# Altium PCB Board.PcbDoc (part 1 of 3)
Units mm, origin at the board's own origin, x right, y up, seen from the top; angles counter-clockwise.
Board outline 120 x 89 mm, 2 copper layers (Top Layer, Bottom Layer); 165 components, 194 nets, 816 pads, 265 vias.
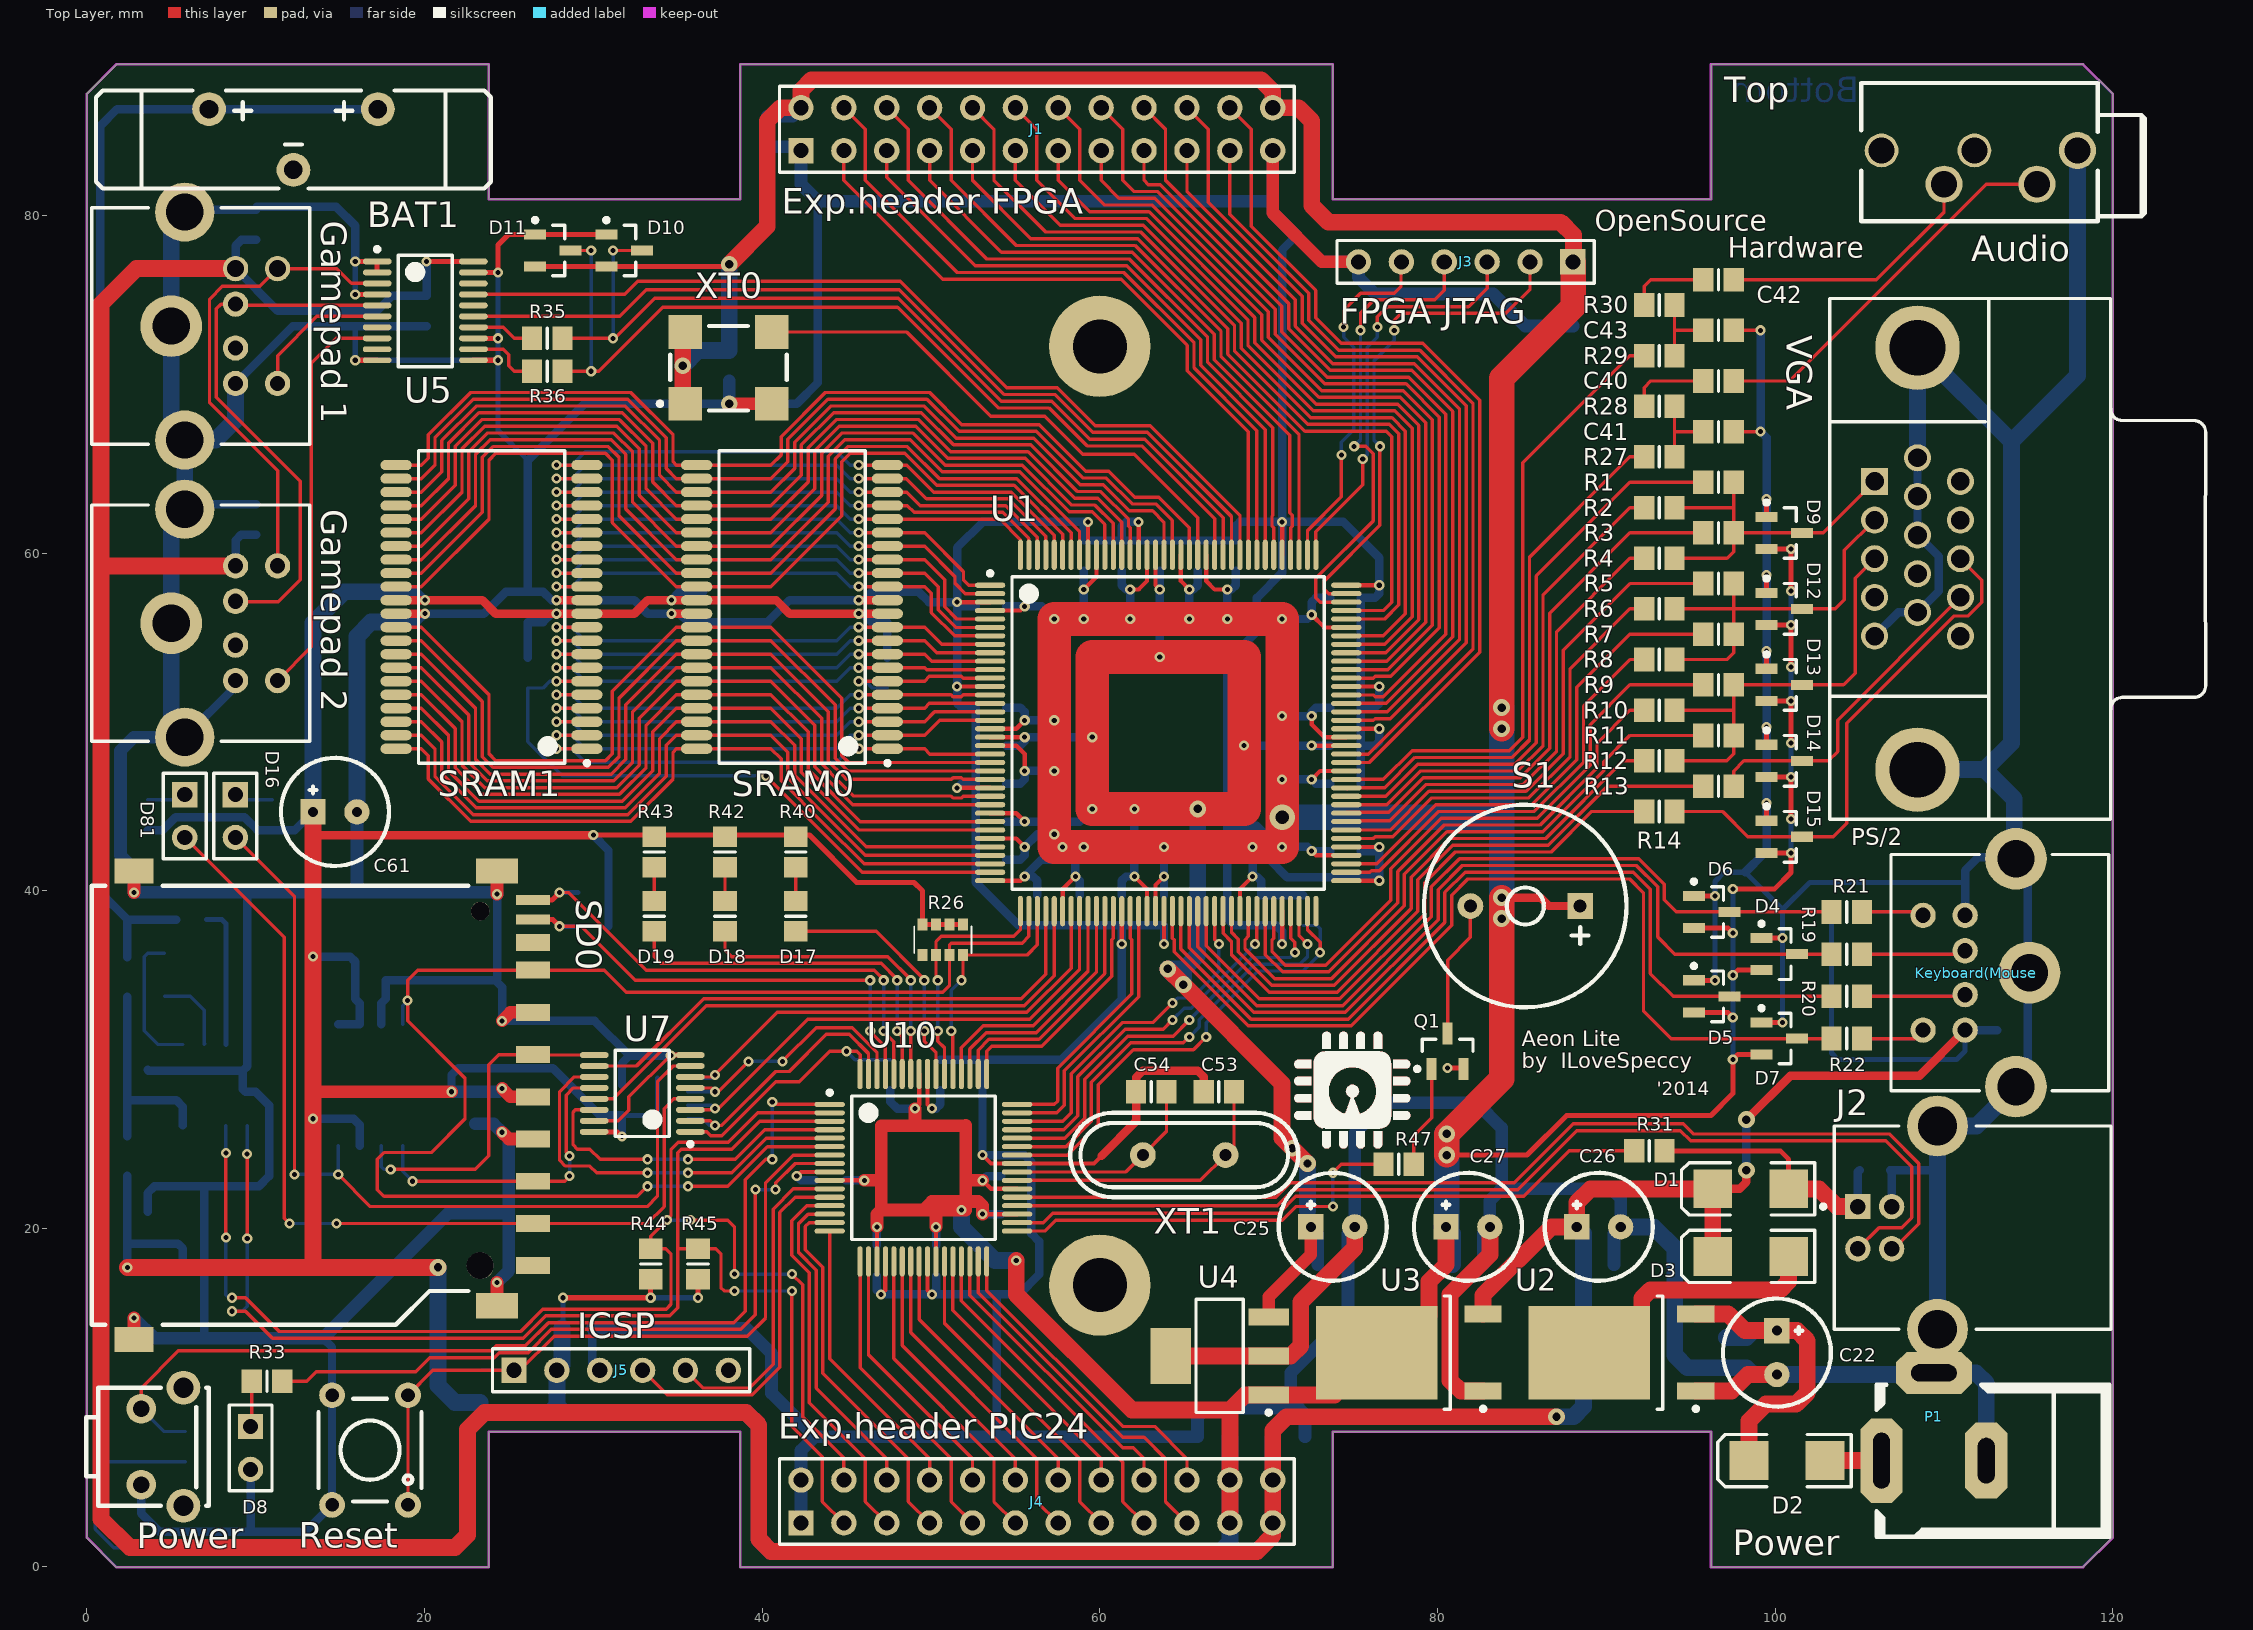
[diagram p0: Top Layer view]
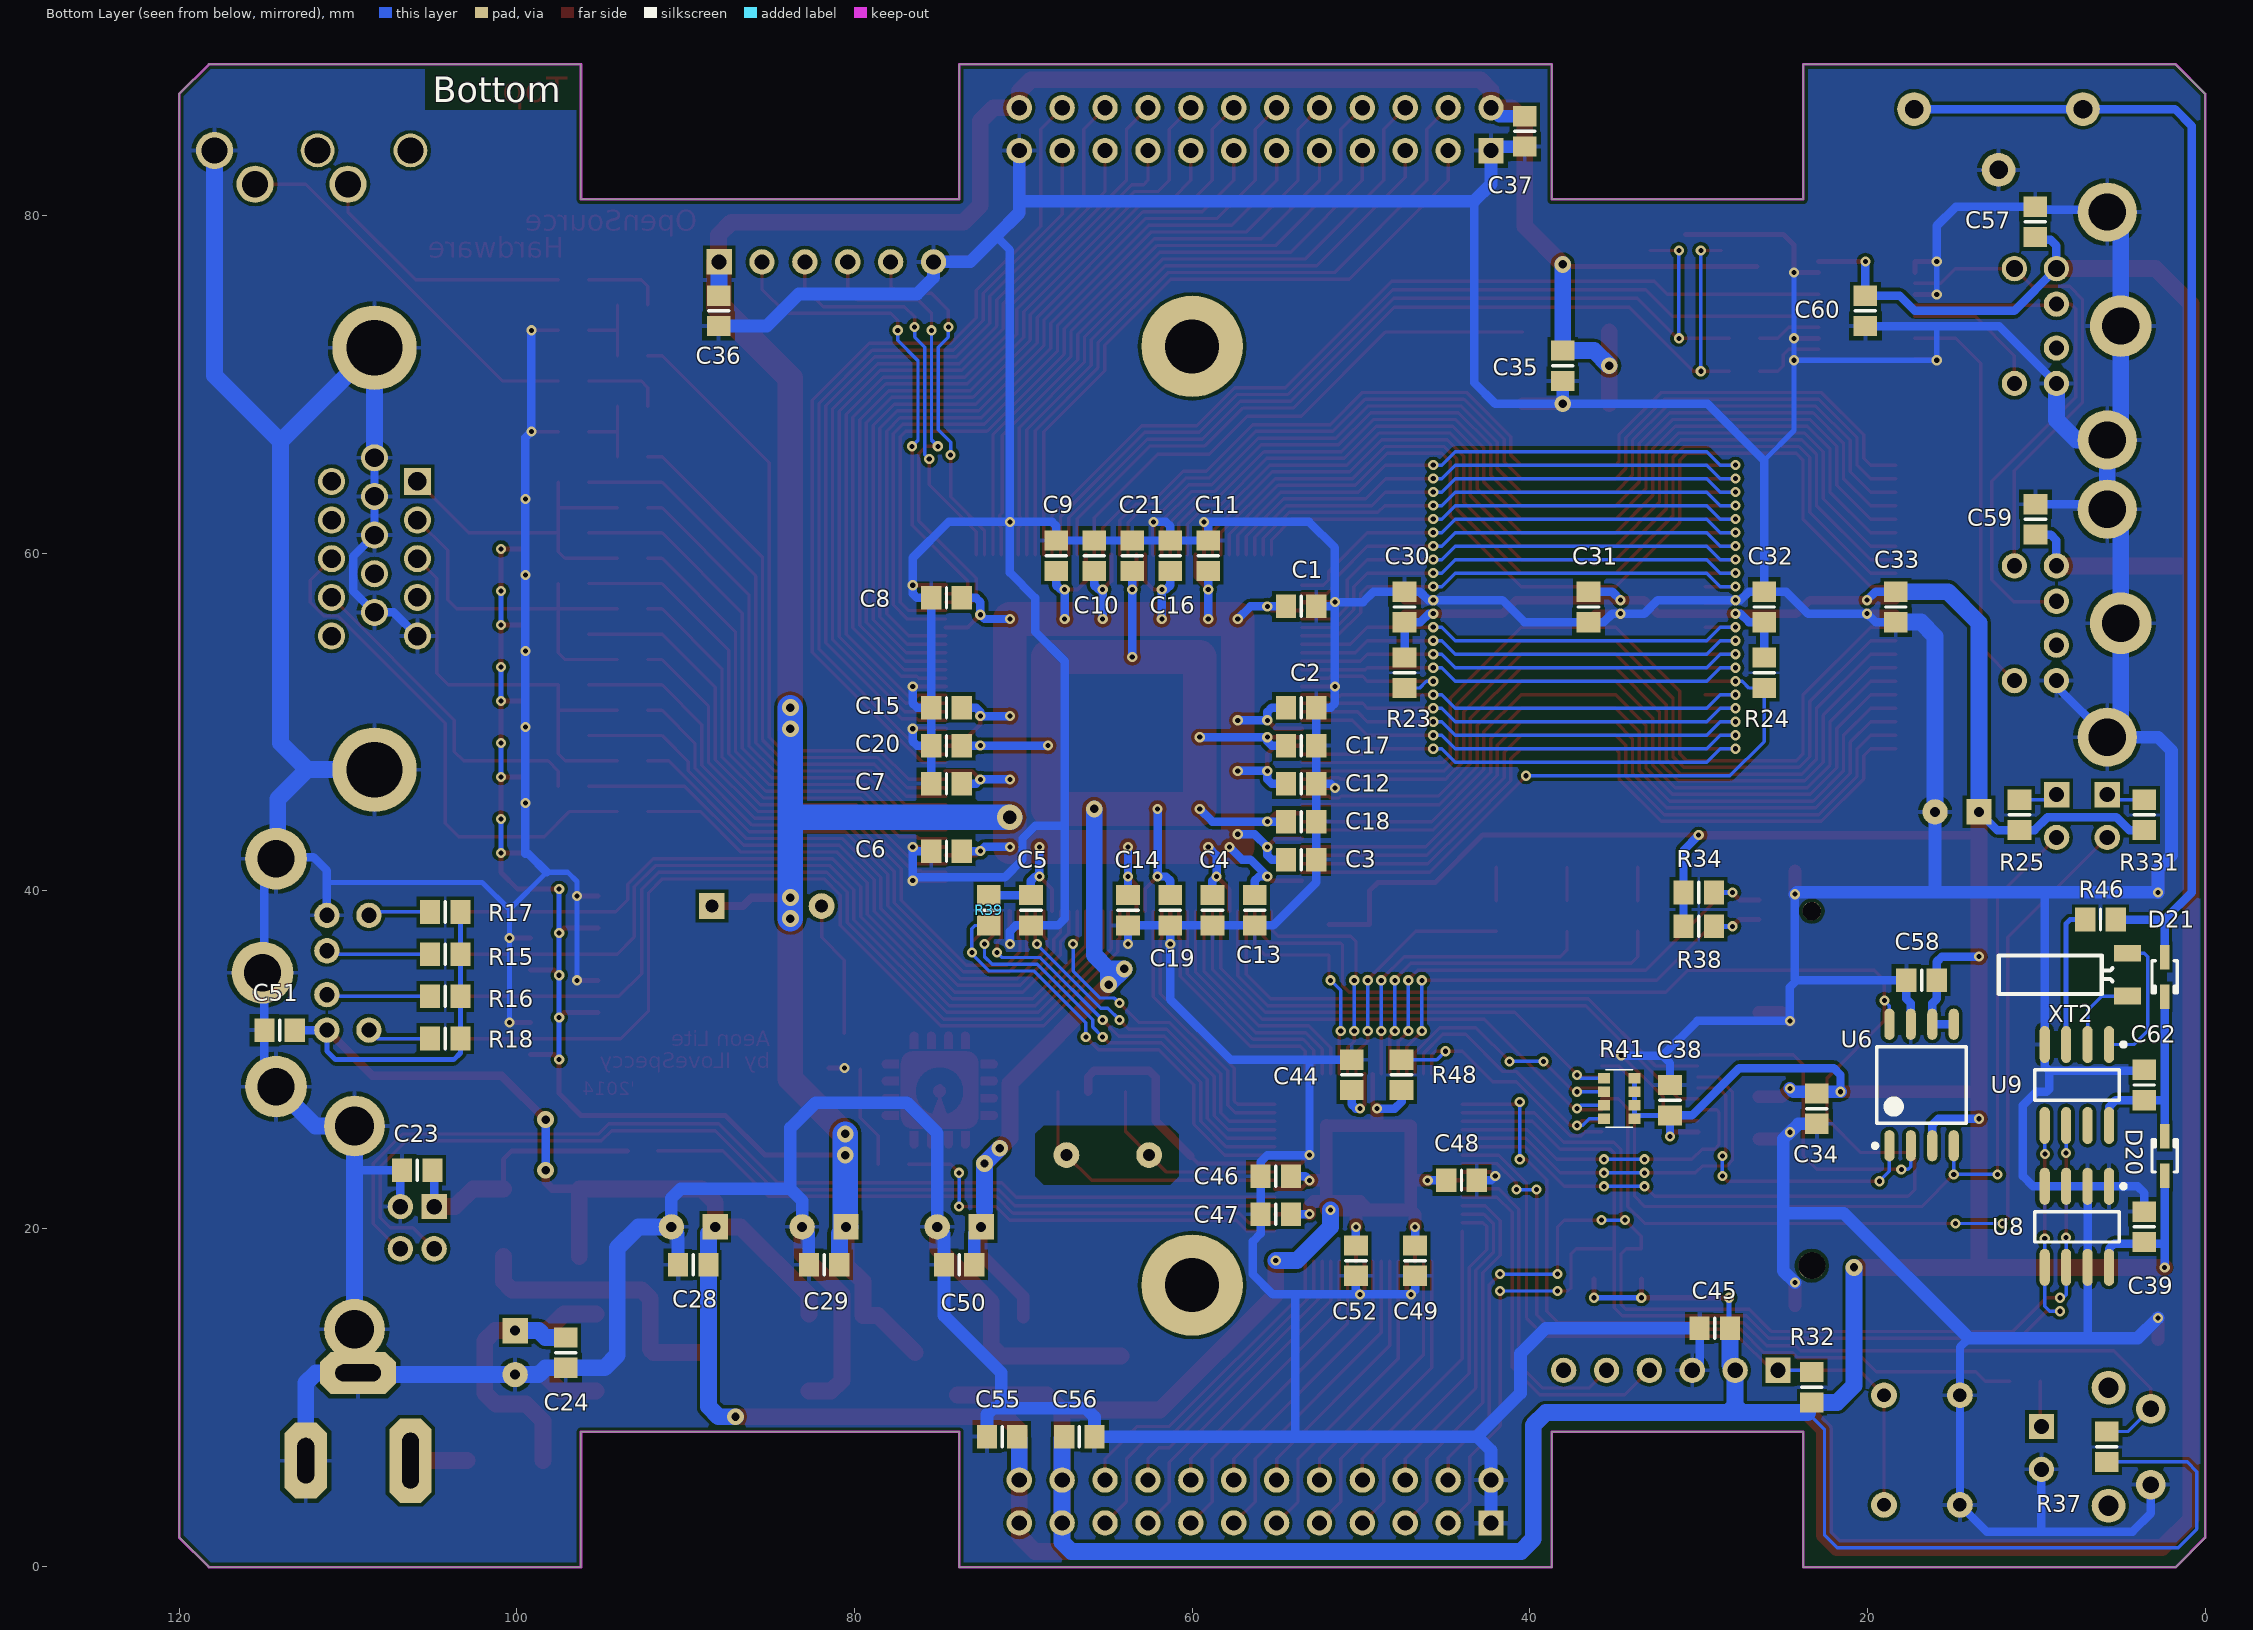
[diagram p1: Bottom Layer view, seen from below]

## Layer stack, top to bottom
Top Layer: signal copper 0.0356
Dielectric: dielectric 0.32, FR-4, Dk 4.8
Bottom Layer: signal copper 0.0356

## Board outline
1.74,-0.05 23.8,-0.05 23.8,7.95 38.7,7.95 38.7,-0.05 73.8,-0.05 73.8,7.95 96.2,7.95 96.2,-0.05 118.241,-0.05 120,1.709 120,87.19 118.24,88.95 96.2,88.95 96.2,80.95 73.8,80.95 73.8,88.95 38.7,88.95 38.7,80.95 23.8,80.95 23.8,88.95 1.741,88.95 0,87.209 0,1.69

## Design rules (kind name [scope] priority, off if disabled: settings)
Clearance [All] p1: gap=0.2
HoleSize [All] p1: absolutevalues=TRUE maxlimit=4 minlimit=0.025 maxpercent=80.000 minpercent=20.000
MinimumSolderMaskSliver [All] p1: minsoldermaskwidth=0.2
PolygonConnect PolygonConnect_Vias [IsVia] p1: connectstyle=Direct reliefconductorwidth=0.254 reliefentries=4 polygonreliefangle="90 Angle" airgapwidth=0.254
PolygonConnect [All] p2: connectstyle=Relief reliefconductorwidth=0.254 reliefentries=4 polygonreliefangle="90 Angle" airgapwidth=0.254
RoutingVias [All] p1: holewidth=0.3 width=0.6 viastyle="Through Hole" minholewidth=0.3 minwidth=0.6 maxholewidth=3.2 maxwidth=5
SilkToSilkClearance [All] p1: silktosilkclearance=0.2
SilkToSolderMaskClearance SilkscreenOverComponentPads [IsPad] p1: minsilkscreentomaskgap=0.2 clearancetoexposedcopper=TRUE
SolderMaskExpansion [All] p1: expansion=0.15
Width [All] p1: maxlimit=5 minlimit=0.2 preferedwidth=0.2
24 further rules are at their usual default settings.

## Classes and differential pairs
component class Controller: C44 C45 C46 C47 C48 C49 C52 C53 C54 C55 C56 D8 D16 D17 D18 D19 D81 J2 J4 J5 Power Q1 R25 R26 R31 R32 R33 R37 R40 R42 R43 R47 R331 Reset S1 U10 XT1
component class "Power Supply": C1 C2 C3 C4 C5 C6 C7 C8 C9 C10 C11 C12 C13 C14 C15 C16 C17 C18 C19 C20 C21 C22 C23 C24 C25 C26 C27 C28 C29 C50 D1 D2 D3 P1 U2 U3 U4
component class "FPGA Banks": C35 C36 C37 C38 J1 J3 R39 U1 XT0
component class Memory: C30 C31 C32 C33 C34 C58 C61 R23 R24 R34 R38 R41 R48 SD0 SRAM0 SRAM1 U6 U7
component class VGA: Audio BAT1 C39 C40 C41 C42 C43 C62 D9 D12 D13 D14 D15 D20 D21 R1 R2 R3 R4 R5 R6 R7 R8 R9 R10 R11 R12 R13 R14 R27 R28 R29 R30 R44 R45 R46 U8 U9 VGA XT2
component class PS2: C51 C57 C59 C60 D4 D5 D6 D7 D10 D11 "Gamepad 1" "Gamepad 2" Keyboard(Mouse R15 R16 R17 R18 R19 R20 R21 R22 R35 R36 U5

## Components (designator, comment, footprint, x,y, rotation, side; value= is the part's Value field where it differs from the comment)
Audio "3.5mm Jack" SJ1-353XNG 117.9,83.85 r180 top
BAT1 "3V" "CR2032 HOLDER - Vertical" 12.24,82.7 r180 top
C1 "Cap" 6-0805_n 53.55,56.85 r0 bottom
C2 "Cap" 6-0805_n 53.55,50.85 r0 bottom
C3 "Cap" 6-0805_n 53.55,41.85 r0 bottom
C4 "Cap" 6-0805_n 58.8,38.85 r90 bottom
C5 "Cap" 6-0805_n 69.55,38.85 r90 bottom
C6 "Cap" 6-0805_n 74.55,42.35 r180 bottom
C7 "Cap" 6-0805_n 74.55,46.35 r180 bottom
C8 "Cap" 6-0805_n 74.55,57.35 r180 bottom
C9 "Cap" 6-0805_n 68.05,59.85 r270 bottom
C10 "Cap" 6-0805_n 65.8,59.85 r270 bottom
C11 "Cap" 6-0805_n 59.05,59.85 r270 bottom
C12 "Cap" 6-0805_n 53.55,46.35 r0 bottom
C13 "Cap" 6-0805_n 56.3,38.85 r90 bottom
C14 "Cap" 6-0805_n 63.8,38.85 r90 bottom
C15 "Cap" 6-0805_n 74.55,50.85 r180 bottom
C16 "Cap" 6-0805_n 61.3,59.85 r270 bottom
C17 "Cap" 6-0805_n 53.55,48.6 r0 bottom
C18 "Cap" 6-0805_n 53.55,44.1 r0 bottom
C19 "Cap" 6-0805_n 61.3,38.85 r90 bottom
C20 "Cap" 6-0805_n 74.55,48.6 r180 bottom
C21 "Cap" 6-0805_n 63.55,59.85 r270 bottom
C22 "Cap Pol3" "ECAP 6.3mm" 100.1,12.65 r270 top
C23 "Cap" 6-0805_n 105.9,23.45 r180 bottom
C24 "Cap" 6-0805_n 97.1,12.65 r90 bottom
C25 "Cap Pol3" "ECAP 6.3mm" 73.8,20.1 r0 top
C26 "Cap Pol3" "ECAP 6.3mm" 89.55,20.1 r0 top
C27 "Cap Pol3" "ECAP 6.3mm" 81.8,20.1 r0 top
C28 "Cap" 6-0805_n 89.55,17.85 r180 bottom
C29 "Cap" 6-0805_n 81.8,17.85 r180 bottom
C30 "Cap" 6-0805_n 47.423,56.814 r270 bottom
C31 "Cap" 6-0805_n 36.523,56.814 r90 bottom
C32 "Cap" 6-0805_n 26.123,56.814 r270 bottom
C33 "Cap" 6-0805_n 18.323,56.814 r90 bottom
C34 "Cap" 6-0805_n 23,27.1 r90 bottom
C35 "Cap" 6-0805_n 38.05,71.1 r90 bottom
C36 "Cap" 6-0805_n 88.05,74.35 r90 bottom
C37 "Cap" 6-0805_n 40.3,84.98 r90 bottom
C38 "Cap" 6-0805_n 31.7,27.6 r270 bottom
C39 "Capacitor" RESC2012N 3.6,20.1 r90 bottom
C40 "Cap" 6-0805_n 96.64,70.2 r180 top
C41 "Cap" 6-0805_n 96.64,67.2 r180 top
C42 "Cap" 6-0805_n 96.64,76.2 r180 top
C43 "Cap" 6-0805_n 96.64,73.2 r180 top
C44 "Cap" 6-0805_n 50.55,29.1 r270 bottom
C45 "Cap" 6-0805_n 29.05,14.1 r180 bottom
C46 "Cap" 6-0805_n 55.05,23.1 r0 bottom
C47 "Cap" 6-0805_n 55.05,20.85 r0 bottom
C48 "Cap" 6-0805_n 44.05,22.85 r180 bottom
C49 "Cap" 6-0805_n 46.8,18.1 r270 bottom
C50 "Cap" 6-0805_n 73.8,17.85 r180 bottom
C51 "Cap" 6-0805_n 114.05,31.75 r180 bottom
C52 "Cap" 6-0805_n 50.3,18.1 r270 bottom
C53 "Cap" 6-0805_n 67.05,28.1 r0 top
C54 "Cap" 6-0805_n 63.05,28.1 r0 top
C55 "Cap" 6-0805_n 71.256,7.676 r180 bottom
C56 "Cap" 6-0805_n 66.684,7.676 r0 bottom
C57 "Cap" 6-0805_n 10.07,79.62 r270 bottom
C58 "Cap" 6-0805_n 16.8,34.7 r180 bottom
C59 "Cap" 6-0805_n 10.05,62 r270 bottom
C60 "Cap" 6-0805_n 20.125,74.35 r90 bottom
C61 "Cap Pol3" "ECAP 6.3mm" 14.7,44.675 r0 top
C62 "Capacitor" RESC2012N 3.6,28.5 r90 bottom
D1 "Diode" SMB 98.55,22.35 r180 top
D2 "Diode" SMB 100.7,6.25 r180 top
D3 "Diode" SMB 98.55,18.35 r180 top
D4 "BAT54S" SOT23_N 100.24,36.25 r0 top
D5 "BAT54S" SOT23_N 96.24,33.75 r0 top
D6 "BAT54S" SOT23_N 96.24,38.75 r0 top
D7 "BAT54S" SOT23_N 100.24,31.25 r0 top
D8 "POWER" HDR1X2 9.7,8.275 r270 top
D9 "BAT54S" SOT23_N 100.54,61.2 r0 top
D10 "BAT54S" SOT23_N 31.825,77.925 r0 top
D11 "BAT54S" SOT23_N 27.6,77.925 r0 top
D12 "BAT54S" SOT23_N 100.54,56.7 r0 top
D13 "BAT54S" SOT23_N 100.54,52.2 r0 top
D14 "BAT54S" SOT23_N 100.54,47.7 r0 top
D15 "BAT54S" SOT23_N 100.54,43.2 r0 top
D16 "FL_ACTIVE" HDR1X2 8.8,45.7 r270 top
D17 "SD_ACTIVE" 6-0805_N 42,38.5 r270 top
D18 "SD_ACTIVE" 6-0805_N 37.8,38.5 r270 top
D19 "SD_ACTIVE" 6-0805_N 33.6,38.5 r270 top
D20 "BA592" SOD-323 2.4,24.3 r90 bottom
D21 "BA592" SOD-323 2.4,34.9 r270 bottom
D81 "SD_ACTIVE" HDR1X2 5.8,45.7 r270 top
"Gamepad 1" "Mini DIN" "Mini DIN PS/2"#1 0.3,73.45 r0 top
"Gamepad 2" "Mini DIN" "Mini DIN PS/2"#2 0.3,55.85 r0 top
J1 "Exp.header FPGA" HDR2X12 42.3,83.84 r0 top
J2 "1-1470156-1" 440119 105.9,20.05 r0 top
J3 "FPGA JTAG" HDR1X6 88.02,77.25 r180 top
J4 "Exp.header PIC24" HDR2X12 42.3,2.56 r0 top
J5 "ICSP" HDR1X6 25.3,11.6 r0 top
Keyboard(Mouse "PS/2" "Mini DIN PS/2"#3 119.76,35.15 r180 top
P1 "Power" "Power Jack" 112.5,6.25 r180 top
Power "BT2" "Push Button 6mm - Right Angle" 3.225,7.075 r90 top
Q1 "BC847" SOT23_N 80.6,30.5 r90 top
R1 "Res2" 6-0805_N 96.64,64.2 r180 top
R2 "Res2" 6-0805_N 93.14,62.7 r180 top
R3 "Res2" 6-0805_N 96.64,61.2 r180 top
R4 "Res2" 6-0805_N 93.14,59.7 r180 top
R5 "Res2" 6-0805_N 96.64,58.2 r180 top
R6 "Res2" 6-0805_N 93.14,56.7 r180 top
R7 "Res2" 6-0805_N 96.64,55.2 r180 top
R8 "Res2" 6-0805_N 93.14,53.7 r180 top
R9 "Res2" 6-0805_N 96.64,52.2 r180 top
R10 "Res2" 6-0805_N 93.14,50.7 r180 top
R11 "Res2" 6-0805_N 96.64,49.2 r180 top
R12 "Res2" 6-0805_N 93.14,47.7 r180 top
R13 "Res2" 6-0805_N 96.64,46.2 r180 top
R14 "Res2" 6-0805_N 93.14,44.7 r180 top
R15 "Res2" 6-0805_N 104.24,36.25 r0 bottom
R16 "Res2" 6-0805_N 104.24,33.75 r0 bottom
R17 "Res2" 6-0805_N 104.24,38.75 r0 bottom
R18 "Res2" 6-0805_N 104.24,31.25 r0 bottom
R19 "Res2" 6-0805_N 104.24,36.25 r0 top
R20 "Res2" 6-0805_N 104.24,33.75 r0 top
R21 "Res2" 6-0805_N 104.24,38.75 r0 top
R22 "Res2" 6-0805_N 104.24,31.25 r0 top
R23 "Res2" 6-0805_N 47.423,52.914 r270 bottom
R24 "Res2" 6-0805_N 26.123,52.914 r270 bottom
R25 "Res2" 6-0805_N 11,44.5 r270 bottom
R26 "10K" "SMD 4 Resisor Network" 52.4,36.3 r90 top
R27 "Res2" 6-0805_N 93.14,65.7 r0 top
R28 "Res2" 6-0805_N 93.14,68.7 r180 top
R29 "Res2" 6-0805_N 93.14,71.7 r0 top
R30 "Res2" 6-0805_N 93.14,74.7 r0 top
R31 "Res2" 6-0805_N 92.55,24.6 r180 top
R32 "Res2" 6-0805_N 23.3,10.6 r270 bottom
R33 "Res2" 6-0805_N 10.675,10.95 r0 top
R34 "Res2" 6-0805_N 30,39.9 r180 bottom
R35 "Res2" 6-0805_N 27.275,72.725 r180 top
R36 "Res2" 6-0805_N 27.275,70.775 r180 top
R37 "Res2" 6-0805_N 5.825,7.075 r270 bottom
R38 "Res2" 6-0805_N 30,37.9 r180 bottom
R39 "Res2" 6-0805_N 72.05,38.85 r270 bottom
R40 "Res2" 6-0805_N 42,42.3 r90 top
R41 "10K" "SMD 4 Resisor Network" 33.9,29.4 r0 bottom
R42 "Res2" 6-0805_N 37.8,42.3 r90 top
R43 "Res2" 6-0805_N 33.6,42.3 r90 top
R44 "Resistor" RESC2012N 33.4,17.9 r270 top
R45 "Resistor" RESC2012N 36.2,17.9 r270 top
R46 "Resistor" RESC2012N 6.2,38.3 r0 bottom
R47 "Resistor" RESC2012N 77.7,23.8 r0 top
R48 "Res2" 6-0805_N 47.6,29.1 r90 bottom
R331 "Res2" 6-0805_N 3.6,44.5 r270 bottom
Reset "BT1" "Push Button 6mm" 19.025,3.625 r180 top
S1 "Buzzer" Buzzer 85.2,39.1 r180 top
SD0 "SD Card" "SD-Card Connector OK" 0.3,40.3 r270 top
SRAM0 "R1LV0816ASB" TSOP44 47.423,48.414 r180 top
SRAM1 "R1LV0816ASB" TSOP44 29.623,48.414 r180 top
U1 "XC6SLX9-3TQG144C" TQG144_N 64.05,49.35 r0 top
U2 "LM1117-5" TD03B_M 90.9,12.65 r180 top
U3 "LM1117-3.3" TD03B_M 78.3,12.65 r180 top
U4 "NCP566" SOT223 67.1,12.45 r180 top
U5 "74HC244" 948E-02_N 20.05,74.35 r0 top
U6 "AT45DB321" SOIC8 16.8,28.5 r90 bottom
U7 "SN74LVC257PW" PW016_N 32.9,28 r180 top
U8 "AT24LC512" 8S1_N 7.6,20.1 r270 bottom
U9 "DS1337S" SOIC8N_N 7.6,28.5 r270 bottom
U10 "PIC24FJ256GB106-I/PT" TQFP-PT64_N 49.55,23.6 r0 top
VGA "Video" "VGA Connector" 105.89,64.25 r270 top
XT0 "Oscillator" "Oscillator SMD 7x5mm" 35.45,68.85 r0 top
XT1 "XTAL" "Quartz HC-49" 62.55,24.35 r0 top
XT2 "XTAL" "SMD Clock Quarz" 4.6,36.3 r180 bottom

## Footprints (in the part's own frame and the unit in brackets; to place one, negate y for a bottom-side part, rotate by r counter-clockwise, add the part's x,y. Pads: shape width x height; smd on the part's side, far side on the other; paste and mask are expansions set on the pad)
6-0805_n [mm] "Chip Resistor, Body 2.0x1.2mm, IPC Medium Density"
  rect 1.2x1.4 smd: 1(-0.9,0) 2(0.9,0)
  silkscreen extent 0,-0.6 0,0.6, body extent -1.07,-0.7 1.07,0.7, height 0.7
6-0805_N [mm] "Chip Resistor, Body 2.0x1.2mm, IPC Medium Density"
  rect 1.2x1.4 smd: 1(-0.9,0) 2(0.9,0)
  silkscreen extent 0,-0.6 0,0.6, body extent -1.07,-0.7 1.07,0.7, height 0.7
8S1_N [mm] "SOIC, 8-Leads, Body 4.9x3.9mm, Pitch 1.27mm, IPC Medium Density"
  oval 2.2x0.6 smd: 1(-2.4,1.905) 2(-2.4,0.635) 3(-2.4,-0.635) 4(-2.4,-1.905) 5(2.4,-1.905) 6(2.4,-0.635) 7(2.4,0.635) 8(2.4,1.905)
  silkscreen extent -2.52,-2.5 0.9,2.88, body extent -2,-2.5 2,2.5, height 1.75
948E-02_N [mm] "TSOP, 20-Leads, Body 6.5x4.4mm, Pitch 0.65mm, IPC Medium Density"
  oval 1.7x0.35 smd: 1(-2.85,2.925) 2(-2.85,2.275) 3(-2.85,1.625) 4(-2.85,0.975) 5(-2.85,0.325) 6(-2.85,-0.325) 7(-2.85,-0.975) 8(-2.85,-1.625) 9(-2.85,-2.275) 10(-2.85,-2.925) 11(2.85,-2.925) 12(2.85,-2.275) 13(2.85,-1.625) 14(2.85,-0.975) 15(2.85,-0.325) 16(2.85,0.325) 17(2.85,0.975) 18(2.85,1.625) 19(2.85,2.275) 20(2.85,2.925)
  silkscreen extent -2.97,-3.3 1.6,3.77, body extent -2.25,-3.3 2.25,3.3, height 1.2
440119 [mm] "Connector; USB1.1, Type B, Thru-Hole; 4 Position; Right Angle"
  rect 1.5x1.5 hole 0.92: 1(-1,1.25)
  round 1.5 hole 0.92: 2(-1,-1.25) 3(1,-1.25) 4(1,1.25)
  round 3.6 hole 2.3: 5(3.71,6.02) 6(3.71,-6.02)
  silkscreen extent -3.18,-6.02 13.99,6.02
Buzzer [mil] "Magnetic Buzzer"
  rect 60x60 hole 30: 1(-127.95,0)
  round 60 hole 30: 2(127.95,0)
  silkscreen extent -236,-236 236,236
"CR2032 HOLDER - Vertical" [mm] "Lithium Battery Holder for CR2032 3V Cell"
  round 2 hole 1.1: 1(-5,-3.6) 1(5,-3.6) 2(0,0)
  silkscreen extent -11.7,-4.7 11.7,1.1
"ECAP 6.3mm" [mm]
  rect 1.5x1.5 hole 0.6: 1(-1.3,0)
  round 1.5 hole 0.6: 2(1.3,0)
  silkscreen extent -3.2,-3.2 3.2,3.2
HDR1X2 [mm] "Connector; Header; 2 Position"
  rect 1.5x1.5 hole 0.9: 1(0,0)
  round 1.5 hole 0.9: 2(2.54,0)
  silkscreen extent -1.27,-1.27 3.81,1.27
HDR1X6 [mm] "Connector; Header; 6 Position"
  rect 1.5x1.5 hole 0.9: 1(0,0)
  round 1.5 hole 0.9: 2(2.54,0) 3(5.08,0) 4(7.62,0) 5(10.16,0) 6(12.7,0)
  silkscreen extent -1.27,-1.27 13.97,1.27
HDR2X12 [mm] "Connector; Header; 12x2 Position"
  rect 1.5x1.5 hole 0.9: 1(0,0)
  round 1.5 hole 0.9: 2(0,2.54) 3(2.54,0) 4(2.54,2.54) 5(5.08,0) 6(5.08,2.54) 7(7.62,0) 8(7.62,2.54) 9(10.16,0) 10(10.16,2.54) 11(12.7,0) 12(12.7,2.54) 13(15.24,0) 14(15.24,2.54) 15(17.78,0) 16(17.78,2.54) 17(20.32,0) 18(20.32,2.54) 19(22.86,0) 20(22.86,2.54) 21(25.4,0) 22(25.4,2.54) 23(27.94,0) 24(27.94,2.54)
  silkscreen extent -1.27,-1.27 29.21,3.81
"Mini DIN PS/2"#1 [mm]
  round 1.5 hole 0.9: 1(8.51,-1.3) 2(8.51,1.3) 3(8.51,-3.4) 6(11,-3.4)
  round 1.5 hole 1: 5(8.51,3.4) 8(11,3.4)
  round 3.5 hole 2.2: MH1(5.5,-6.75) MH3(5.5,6.75)
  round 3.65 hole 2.2: MH2(4.7,0)
  silkscreen extent 0,-7 12.9,7, body extent -0.2,-6.72 12.9,7.62, height 12.8
"Mini DIN PS/2"#2 [mm]
  round 1.5 hole 0.9: 1(8.51,-1.3) 2(8.51,1.3) 3(8.51,-3.4) 5(8.51,3.4) 6(11,-3.4) 8(11,3.4)
  round 3.5 hole 2.2: MH1(5.5,-6.75) MH3(5.5,6.75)
  round 3.65 hole 2.2: MH2(4.7,0)
  silkscreen extent 0,-7 12.9,7, body extent -0.2,-6.72 12.9,7.62, height 12.8
"Mini DIN PS/2"#3 [mm]
  round 1.5 hole 0.9: 1(8.51,-1.3) 2(8.51,1.3) 3(8.51,-3.4) 5(8.51,3.4) 6(11,-3.4) 8(11,3.4)
  round 3.65 hole 2.2: MH1(5.5,-6.75) MH2(4.7,0) MH3(5.5,6.75)
  silkscreen extent 0,-7 12.9,7, body extent -0.2,-6.72 12.9,7.62, height 12.8
"Oscillator SMD 7x5mm" [mm]
  rect 2x2 smd: 1(0,0) 2(5.125,0) 3(5.125,4.25) 4(0,4.25)
  silkscreen extent -1.63,-0.4 6,4.6
"Power Jack" [mm]
  oct 2.5x5 hole 1 slot 3.3 at 90 deg: 1(6.2,0)
  oct 2.5x4.5 hole 1 slot 2.7 at 90 deg: 2(0,0)
  oct 4.5x2.5 hole 1 slot 2.7 at 0 deg: 3(3.1,-5.2)
  silkscreen extent -7.3,-4.5 6.5,4.5, body extent -7.35,-6.35 7.56,6.35, height 10.96
"Push Button 6mm" [mm]
  round 1.524 hole 0.8: 1(0,0) 1(0,-6.5) 2(4.5,-6.5) 2(4.5,0)
  silkscreen extent -0.8,-6.3 5.3,-0.2
"Push Button 6mm - Right Angle" [mm]
  round 1.75 hole 1: 1(-2.25,0) 2(2.25,0)
  round 2 hole 1.2: MH(-3.5,-2.5) MH(3.5,-2.5)
  silkscreen extent -3.5,-4 3.5,3.25
PW016_N [mm] "TSOP, 16-Leads, Body 5x4.4mm, Pitch 0.65mm, IPC Medium Density"
  oval 1.7x0.35 smd: 1(-2.85,2.275) 2(-2.85,1.625) 3(-2.85,0.975) 4(-2.85,0.325) 5(-2.85,-0.325) 6(-2.85,-0.975) 7(-2.85,-1.625) 8(-2.85,-2.275) 9(2.85,-2.275) 10(2.85,-1.625) 11(2.85,-0.975) 12(2.85,-0.325) 13(2.85,0.325) 14(2.85,0.975) 15(2.85,1.625) 16(2.85,2.275)
  silkscreen extent -2.98,-2.55 1.6,3.12, body extent -2.25,-2.55 2.25,2.55, height 1.2
"Quartz HC-49" [mil]
  round 60 hole 27.56: 1(0,0) 2(192.91,0)
  silkscreen extent -169,-98 362,98
RESC2012N [mm] "Chip Resistor, Body 2.0x1.3mm, IPC Medium Density"
  rect 1.2x1.4 smd: 1(-0.9,0) 2(0.9,0)
  silkscreen extent 0,-0.6 0,0.6, body extent -1,-0.62 1,0.62, height 0.45
"SD-Card Connector OK" [mm]
  round 1.1 hole 1.1: 0(1.5,23)
  round 1.6 hole 1.6: 0(22.5,23)
  rect 1x2 smd: 1(20,26.125) 2(17.5,26.125) 3(15,26.125) 4(12.5,26.125) 5(10,26.125) 6(7.5,26.125) 7(5,26.125) 8(3.35,26.125) 9(22.5,26.125)
  rect 0.6x2 smd: 10(2,26.125) 11(0.85,26.125)
  rect 1.5x2.5 smd: 12(-0.875,24) 14(24.875,24)
  rect 1.5x2.3 smd: 13(-0.875,2.5) 15(26.875,2.5)
  silkscreen extent 0,0 26,22.3, body extent -0.95,-0.08 27.03,26.18, height 3.3
SJ1-353XNG [mm] "3.5MM Audio Jack"
  round 2.2 hole 1.55: 1(0,0) 2(2.4,2) 3(7.9,2)
  round 2 hole 1.55: 4(11.6,0) 5(6.1,0)
  silkscreen extent -4,-4 12.8,4.2, body extent -5.21,-4.08 12.76,4.03, height 11.5
SMB [mm] "DO-214-AA/SMB; 2 C-Bend Leads; Body 5.3 x 3.6 mm, inc. leads (LxW)"
  rect 2.3x2.3 smd: 1(-2.25,0) 2(2.25,0)
  silkscreen extent -3.8,-1.55 4.1,1.55
"SMD 4 Resisor Network" [mm]
  rect 0.7x0.6 smd: 1(-0.1,2.9) 2(1.7,2.9) 3(-0.1,2.1) 4(1.7,2.1) 5(-0.1,1.3) 6(1.7,1.3) 7(-0.1,0.5) 8(1.7,0.5)
  silkscreen extent 0,0 1.6,3.4
"SMD Clock Quarz" [mm]
  rect 1.6x1 smd: 1(0,0) 2(0,-2.54)
  silkscreen extent -7.62,-2.41 -0.89,-0.13
SOD-323 [mm] "SOD-323/SC-76; 2 Leads; Body 1.7 x 1.3 mm, (LxW)"
  rect 1.45x0.55 smd: 1(1.175,0) 2(-1.175,0)
  silkscreen extent -0.95,-0.75 0.95,0.75
SOIC8 [mm] "SOIC, 8-Leads, Body 5,3x5,4mm (max), Pitch 1,27mm, IPC Medium Density"
  oval 1.85x0.6 smd: 1(-3.6,1.905) 2(-3.6,0.635) 3(-3.6,-0.635) 4(-3.6,-1.905) 5(3.6,-1.905) 6(3.6,-0.635) 7(3.6,0.635) 8(3.6,1.905)
  silkscreen extent -3.72,-2.65 2.27,2.88, body extent -2.7,-2.68 2.7,2.68, height 2.16
SOIC8N_N [mm] "SOIC, 8-Leads, Body 4.9x3.9mm, Pitch 1.27mm, IPC Medium Density"
  oval 2.2x0.6 smd: 1(-2.4,1.905) 2(-2.4,0.635) 3(-2.4,-0.635) 4(-2.4,-1.905) 5(2.4,-1.905) 6(2.4,-0.635) 7(2.4,0.635) 8(2.4,1.905)
  silkscreen extent -2.52,-2.5 0.9,2.88, body extent -2,-2.5 2,2.5, height 1.75
SOT23_N [mm] "SOT23, 3-Leads, Body 2.9x1.3mm, Pitch 0.95mm, Lead Span 2.3mm, IPC Medium Density"
  rect 1.3x0.6 smd: 1(-1.05,0.95) 2(-1.05,-0.95) 3(1.05,0)
  silkscreen extent -1.17,-1.5 0.7,1.92, body extent -0.7,-1.5 0.7,1.5, height 1.1
SOT223 [mm]
  rect 2.4x1 smd: 1(-2.9,2.3) 2(-2.9,0) 3(-2.9,-2.3)
  rect 2.4x3.3 smd: 4(2.9,0)
  silkscreen extent -3.03,-3.35 1.4,3.47, body extent -1.85,-3.35 1.85,3.35, height 1.8
TD03B_M [mm] "D-PAK, 4-Leads, Body 6.1x6.6mm, Pitch 2.29mm, Lead Span 9.7mm, IPC Low Density"
  rect 2.2x1 smd: 1(-4.4,2.28) 3(-4.4,-2.28)
  rect 7.2x5.55 smd: 4(1.9,0)
  silkscreen extent -4.52,-3.35 -2.1,3.45, body extent -2.45,-3.35 3.75,3.35, height 2.38
TQFP-PT64_N [mm] "Thin QFP, 64-Leads, Body 10x10mm, Pitch 0.5mm, IPC Medium Density"
  oval 1.8x0.3 smd: 1(-5.55,3.75) 2(-5.55,3.25) 3(-5.55,2.75) 4(-5.55,2.25) 5(-5.55,1.75) 6(-5.55,1.25) 7(-5.55,0.75) 8(-5.55,0.25) 9(-5.55,-0.25) 10(-5.55,-0.75) 11(-5.55,-1.25) 12(-5.55,-1.75) 13(-5.55,-2.25) 14(-5.55,-2.75) 15(-5.55,-3.25) 16(-5.55,-3.75) 33(5.55,-3.75) 34(5.55,-3.25) 35(5.55,-2.75) 36(5.55,-2.25) 37(5.55,-1.75) 38(5.55,-1.25) 39(5.55,-0.75) 40(5.55,-0.25) 41(5.55,0.25) 42(5.55,0.75) 43(5.55,1.25) 44(5.55,1.75) 45(5.55,2.25) 46(5.55,2.75) 47(5.55,3.25) 48(5.55,3.75)
  oval 0.3x1.8 smd: 17(-3.75,-5.55) 18(-3.25,-5.55) 19(-2.75,-5.55) 20(-2.25,-5.55) 21(-1.75,-5.55) 22(-1.25,-5.55) 23(-0.75,-5.55) 24(-0.25,-5.55) 25(0.25,-5.55) 26(0.75,-5.55) 27(1.25,-5.55) 28(1.75,-5.55) 29(2.25,-5.55) 30(2.75,-5.55) 31(3.25,-5.55) 32(3.75,-5.55) 49(3.75,5.55) 50(3.25,5.55) 51(2.75,5.55) 52(2.25,5.55) 53(1.75,5.55) 54(1.25,5.55) 55(0.75,5.55) 56(0.25,5.55) 57(-0.25,5.55) 58(-0.75,5.55) 59(-1.25,5.55) 60(-1.75,5.55) 61(-2.25,5.55) 62(-2.75,5.55) 63(-3.25,5.55) 64(-3.75,5.55)
  silkscreen extent -5.67,-4.25 4.25,4.57, body extent -5,-5 5,5, height 1.2
TQG144_N [mm] "Thin QFP, 144-Leads, Body 20x20mm, Pitch 0.5mm, IPC Medium Density"
  oval 1.8x0.3 smd: 1(-10.55,8.75) 2(-10.55,8.25) 3(-10.55,7.75) 4(-10.55,7.25) 5(-10.55,6.75) 6(-10.55,6.25) 7(-10.55,5.75) 8(-10.55,5.25) 9(-10.55,4.75) 10(-10.55,4.25) 11(-10.55,3.75) 12(-10.55,3.25) 13(-10.55,2.75) 14(-10.55,2.25) 15(-10.55,1.75) 16(-10.55,1.25) 17(-10.55,0.75) 18(-10.55,0.25) 19(-10.55,-0.25) 20(-10.55,-0.75) 21(-10.55,-1.25) 22(-10.55,-1.75) 23(-10.55,-2.25) 24(-10.55,-2.75) 25(-10.55,-3.25) 26(-10.55,-3.75) 27(-10.55,-4.25) 28(-10.55,-4.75) 29(-10.55,-5.25) 30(-10.55,-5.75) 31(-10.55,-6.25) 32(-10.55,-6.75) 33(-10.55,-7.25) 34(-10.55,-7.75) 35(-10.55,-8.25) 36(-10.55,-8.75) 73(10.55,-8.75) 74(10.55,-8.25) 75(10.55,-7.75) 76(10.55,-7.25) 77(10.55,-6.75) 78(10.55,-6.25) 79(10.55,-5.75) 80(10.55,-5.25) 81(10.55,-4.75) 82(10.55,-4.25) 83(10.55,-3.75) 84(10.55,-3.25) 85(10.55,-2.75) 86(10.55,-2.25) 87(10.55,-1.75) 88(10.55,-1.25) 89(10.55,-0.75) 90(10.55,-0.25) 91(10.55,0.25) 92(10.55,0.75) 93(10.55,1.25) 94(10.55,1.75) 95(10.55,2.25) 96(10.55,2.75) 97(10.55,3.25) 98(10.55,3.75) 99(10.55,4.25) 100(10.55,4.75) 101(10.55,5.25) 102(10.55,5.75) 103(10.55,6.25) 104(10.55,6.75) 105(10.55,7.25) 106(10.55,7.75) 107(10.55,8.25) 108(10.55,8.75)
  oval 0.3x1.8 smd: 37(-8.75,-10.55) 38(-8.25,-10.55) 39(-7.75,-10.55) 40(-7.25,-10.55) 41(-6.75,-10.55) 42(-6.25,-10.55) 43(-5.75,-10.55) 44(-5.25,-10.55) 45(-4.75,-10.55) 46(-4.25,-10.55) 47(-3.75,-10.55) 48(-3.25,-10.55) 49(-2.75,-10.55) 50(-2.25,-10.55) 51(-1.75,-10.55) 52(-1.25,-10.55) 53(-0.75,-10.55) 54(-0.25,-10.55) 55(0.25,-10.55) 56(0.75,-10.55) 57(1.25,-10.55) 58(1.75,-10.55) 59(2.25,-10.55) 60(2.75,-10.55) 61(3.25,-10.55) 62(3.75,-10.55) 63(4.25,-10.55) 64(4.75,-10.55) 65(5.25,-10.55) 66(5.75,-10.55) 67(6.25,-10.55) 68(6.75,-10.55) 69(7.25,-10.55) 70(7.75,-10.55) 71(8.25,-10.55) 72(8.75,-10.55) 109(8.75,10.55) 110(8.25,10.55) 111(7.75,10.55) 112(7.25,10.55) 113(6.75,10.55) 114(6.25,10.55) 115(5.75,10.55) 116(5.25,10.55) 117(4.75,10.55) 118(4.25,10.55) 119(3.75,10.55) 120(3.25,10.55) 121(2.75,10.55) 122(2.25,10.55) 123(1.75,10.55) 124(1.25,10.55) 125(0.75,10.55) 126(0.25,10.55) 127(-0.25,10.55) 128(-0.75,10.55) 129(-1.25,10.55) 130(-1.75,10.55) 131(-2.25,10.55) 132(-2.75,10.55) 133(-3.25,10.55) 134(-3.75,10.55) 135(-4.25,10.55) 136(-4.75,10.55) 137(-5.25,10.55) 138(-5.75,10.55) 139(-6.25,10.55) 140(-6.75,10.55) 141(-7.25,10.55) 142(-7.75,10.55) 143(-8.25,10.55) 144(-8.75,10.55)
  silkscreen extent -10.67,-9.25 9.25,9.57, body extent -10,-10 10,10, height 1.6
TSOP44 [mm]
  oval 1.85x0.6 smd: 1(0,0) 2(0,-0.8) 3(0,-1.6) 4(0,-2.4) 5(0,-3.2) 6(0,-4) 7(0,-4.8) 8(0,-5.6) 9(0,-6.4) 10(0,-7.2) 11(0,-8) 12(0,-8.8) 13(0,-9.6) 14(0,-10.4) 15(0,-11.2) 16(0,-12) 17(0,-12.8) 18(0,-13.6) 19(0,-14.4) 20(0,-15.2) 21(0,-16) 22(0,-16.8) 23(11.3,-16.8) 24(11.3,-16) 25(11.3,-15.2) 26(11.3,-14.4) 27(11.3,-13.6) 28(11.3,-12.8) 29(11.3,-12) 30(11.3,-11.2) 31(11.3,-10.4) 32(11.3,-9.6) 33(11.3,-8.8) 34(11.3,-8) 35(11.3,-7.2) 36(11.3,-6.4) 37(11.3,-5.6) 38(11.3,-4.8) 39(11.3,-4) 40(11.3,-3.2) 41(11.3,-2.4) 42(11.3,-1.6) 43(11.3,-0.8) 44(11.3,0)
  silkscreen extent -0.13,-17.65 9.98,0.97, body extent -0.16,-17.51 11.6,0.7, height 1.3
"VGA Connector" [mm]
  rect 1.6x1.6 hole 1.1: 1(0,0)
  round 1.6 hole 1.1: 2(2.29,0) 3(4.58,0) 4(6.87,0) 5(9.16,0) 6(-1.4,2.54) 7(0.89,2.54) 8(3.18,2.54) 9(5.47,2.54) 10(7.76,2.54) 11(0,5.08) 12(2.29,5.08) 13(4.58,5.08) 14(6.87,5.08) 15(9.16,5.08)
  round 5 hole 3.3: 16(-7.915,2.54) 17(17.075,2.54)
  silkscreen extent -10.83,-2.65 20.01,19.61, body extent -11.43,-2.69 19.38,19.69, height 12.75

## Part data
Audio: library part "Phono Jack"
BAT1: library part "CR2032 Battery"
C1 C2 C3 C4 C5 C6 C7 C8 C9 C10 C11 C12 C13 C14 C15 C16 C17 C18 C19 C20 C21 C23 C24 C28 C29 C30 C31 C32 C33 C34 C35 C36 C37 C38 C40 C41 C42 C43 C44 C45 C46 C47 C48 C49 C50 C51 C52 C53 C54 C55 C56 C57 C58 C59 C60: "Capacitor"
C22 C25 C26 C27 C61: "Polarized Capacitor (Surface Mount)"
D1 D2 D3: "Default Diode"
D4 D5 D6 D7 D9 D10 D11 D12 D13 D14 D15: "Schottky Barrier Double Diode"
D8 D16 D17 D18 D19 D81: library part LED0, "Typical INFRARED GaAs LED"
D20 D21: "Silicon RF Switching Diode for VHF Band Switching in TV/VTR Tuners"
"Gamepad 1" "Gamepad 2" Keyboard(Mouse: library part "Mini DIN PS/2"
J1 J4: library part "Header 12X2", "Header, 12-Pin, Dual row"
J2: "USB 1.1, Right Angle, Thru-Hole, B Type, Receptacle, 4 Position, White"
J3 J5: library part "Header 6", "Header, 6-Pin"
P1: library part "Power Jack"
Power Reset: library part "Push Button"
Q1: library part BF547, "NPN 1 GHz Wideband Transistor"
R1 R2 R3 R4 R5 R6 R7 R8 R9 R10 R11 R12 R13 R14 R15 R16 R17 R18 R19 R20 R21 R22 R23 R24 R25 R27 R28 R29 R30 R31 R32 R33 R34 R35 R36 R37 R38 R39 R40 R42 R43 R48 R331: "Resistor"
R26 R41: library part "SMD 4 Resistor Network"
S1: library part "Buzzer CEM-1206S/WT-1201", "Magnetic Buzzer"
SD0: library part "SD Card Connector"
SRAM0 SRAM1: "8Mbit (512Kb x 16) Asynchron Static RAM"
U1: "Spartan-6 LX 1.2V FPGA, 102 User I/Os, 144-Pin TQFP (0.5mm Pitch), Speed Grade 3, Commercial Grade, Pb-Free"
U2 U3: library part LM1117DT-3.3, "800mA Low-Dropout Linear Regulator, 3-pin TO-252"
U5: library part MC74HC244ADW, "Octal 3-State Non-Inverting Buffer/Line Driver/Line Receiver"
U6: library part AT45DB321D
U7: "Quadruple 2-Line to 1-Line Data Selector/Multiplexer with 3-State Outputs"
U8: library part AT24C01BN-SP25-B, "1Kbit (128 x 8), 2-wire Bus Automotive Serial EEPROM with Write Protect, 2.5V, 8-Pin SOIC, Bulk"
U9: library part DS1307Z, "64 X 8 Serial Real-Time Clock"
U10: "General Purpose 16-Bit Flash Microcontroller with USB On-The-Go, 256KB Flash, 16KB SRAM, 64-Pin TQFP, Industrial Temperature"
VGA: library part "VGA Connector"

## Free pads (board coordinates)
  round 6 hole 3.2: 0(60,16.65) 0(60,72.25)

## Via types
v1: diameter 0.6, hole 0.3, Top Layer to Bottom Layer, tented both sides, 246 vias
v2: diameter 1, hole 0.5, Top Layer to Bottom Layer, tented both sides, 18 vias
v3: diameter 1.5, hole 0.8, Top Layer to Bottom Layer, tented both sides, 1 vias

## Nets (pads, with @x,y where several pads share a name; then routed paths per layer and width w, separated by ;. In a path a pad name is that pad's centre, name@x,y a point inside that pad or via, vN(x,y) a via of type N, cw(c..) or ccw(c..) an arc to the next point about the centre after c; other vN are vias at no path point)
+1.2V: C17.2 C18.2 C19.2 C20.2 C21.2 C25.1 C50.2 U1.19 U1.28 U1.52 U1.89 U1.128 U4.3 | length 114.7
  Top Layer w0.254: U1.28@53.5,44.6 55.05,44.6 v1(55.55,44.1) ; U1.19@53.5,49.1 v1(55.55,49.1) ; v1(62.05,40.85) 62.8,40.1 U1.52@62.8,38.8 ; U1.128@63.3,59.9 63.3,58.1 v1(63.55,57.85) ; v1(72.55,48.6) U1.89@74.6,48.6
  Top Layer w0.75: U4.3@70,14.75 70,15.95 72.5,18.45 C25.1@72.5,20.1
  Top Layer w1: v2(64.025,35.375) v2(64.95,34.45) 70.8,28.6 70.8,25.35 v2(71.4,24.75) v2(72.3,23.85)
  Top Layer w2: v1(59.55,44.85) v1(59.55,49.1) 59.55,53.85 v1(63.55,53.85) 68.55,53.85 v1(68.55,48.6) 68.55,44.85 v1(62.05,44.85) v1(59.55,44.85)
  Bottom Layer w0.5: C18.2@54.45,44.1 v1(55.55,44.1) 58.8,44.1 v1(59.55,44.85) ; C17.2@54.45,48.6 55.3,48.6 55.55,48.85 v1(55.55,49.1) v1(59.55,49.1) ; C19.2@61.3,39.75 61.3,40.6 61.55,40.85 v1(62.05,40.85) v1(62.05,44.85) ; v1(63.55,53.85) v1(63.55,57.85) C21.2@63.55,58.95 ; v1(68.55,48.6) v1(72.55,48.6) C20.2@73.65,48.6
  Bottom Layer w0.75: C25.1@72.5,20.1 72.9,19.7 C50.2@72.9,17.85
  Bottom Layer w1: 64.95,35.35 v2(64.95,34.45) v2(64.025,35.375) 64.975,35.375 65.8,36.2 v2(65.8,44.85) ; v2(71.4,24.75) v2(72.3,23.85) 72.3,21.05 ; C25.1@72.3,20.3 C25.1@72.5,20.1
+3.3V: C1.2 C2.2 C3.2 C4.2 C5.2 C6.2 C7.2 C8.2 C9.2 C10.2 C11.2 C12.2 C13.2 C14.2 C15.2 C16.2 C27.1 C29.2 C30.2 C31.2 C32.2 C33.2 C34.2 C35.2 C36.2 C37.2 C38.2 C39.1 C45.2 C46.1 C47.1 C48.1 C49.1 C52.1 C56.2 C58.2 C61.1 D4.2 D5.2 D6.2 D7.2 D9.2 D10.2 D11.2 D12.2 D13.2 D14.2 D15.2 D20.2 J1.2 J1.24 J3.1 J4.21 J4.22 J5.2 R23.1 R24.1 R25.2 R26.2 R26.4 R26.6 R26.8 R32.2 R34.1 R37.2 R38.1 R39.1 R40.2 R41.1 R41.3 R41.5 R41.7 R42.2 R43.2 R44.2 R45.2 R48.1 R331.2 S1.1 SD0.4 SRAM0.11 SRAM0.33 SRAM1.11 SRAM1.33 U1.4 U1.18 U1.20 U1.31 U1.36 U1.42 U1.53 U1.63 U1.76 U1.86 U1.90 U1.103 U1.122 U1.125 U1.129 U1.135 U3.4 U4.1 U6.3 U6.5 U6.6 U7.16 U8.8 U10.10 U10.19 U10.26 U10.35 U10.38 U10.57 XT0.1 XT0.4 | length 836.9
  Top Layer w0.254: U10.10@44,22.85 v1(46.05,22.85) ; U10.19@46.8,18.05 v1(46.8,20.1) ; v1(49.05,27.1) 49.3,27.35 49.3,27.85 U10.57@49.3,29.15 ; U10.26@50.3,18.05 v1(50.3,20.1) ; v1(53.05,20.85) U10.35@55.1,20.85 ; v1(53.05,22.85) 53.55,22.35 U10.38@55.1,22.35 ; U1.36@53.5,40.6 55.3,40.6 v1(55.55,40.85) ; U1.31@53.5,43.1 55.05,43.1 v1(55.55,42.6) ; U1.20@53.5,48.6 55.05,48.6 55.55,48.1 v1(55.55,47.1) ; U1.18@53.5,49.6 55.05,49.6 v1(55.55,50.1) ; U1.4@53.5,56.6 55.3,56.6 v1(55.55,56.85) ; U1.42@57.8,38.8 57.8,40.1 v1(58.55,40.85) ; v1(59.05,57.85) 59.8,58.6 U1.135@59.8,59.9 ; v1(61.8,57.85) 62.3,57.85 62.8,58.35 U1.129@62.8,59.9 ; U1.53@63.3,38.8 63.3,40.35 v1(63.8,40.85) ; U1.125@64.8,59.9 64.8,58.35 v1(65.3,57.85) ; U1.122@66.3,59.9 66.3,58.35 66.8,57.85 v1(67.55,57.85) ; U1.63@68.3,38.8 68.3,40.1 v1(69.05,40.85) ; v1(72.55,42.35) 72.8,42.1 U1.76@74.6,42.1 ; v1(72.55,46.6) 73.05,47.1 U1.86@74.6,47.1 ; v1(72.55,50.35) 72.55,49.85 73.3,49.1 U1.90@74.6,49.1 ; v1(72.55,56.35) 73.3,55.6 U1.103@74.6,55.6
  Top Layer w0.3: D11.2@26.55,76.975 D10.2@30.775,76.975 37.925,76.975 v2(38.05,77.1) ; v1(28.2,15.9) v1(33.4,15.9) R44.2@33.4,17 ; v1(30,43.3) 42.8,43.3 45.6,40.5 49,40.5 49.5,40 R26.2@49.5,38 R26.4@50.3,38 R26.6@51.1,38 R26.8@51.9,38 ; U7.16@30.05,25.725 31.425,25.725 v1(31.7,25.45) ; v1(36.2,15.9) R45.2@36.2,17 ; v2(80.55,24.35) 85.3,24.35 87.65,26.7 96.2,26.7 97.49,27.99 v1(97.49,30) 97.79,30.3 D7.2@99.19,30.3 ; D5.2@95.19,32.8 97.19,32.8 v1(97.49,32.5) ; D6.2@95.19,37.8 97.19,37.8 v1(97.49,37.5) ; v1(97.49,35) 97.79,35.3 D4.2@99.19,35.3 ; v1(97.49,40.1) 99.95,40.1 100.94,41.09 v1(100.94,42.25) D15.2@99.49,42.25 ; D14.2@99.49,46.75 v1(100.94,46.75) v1(100.94,44.25) ; D13.2@99.49,51.25 v1(100.94,51.25) v1(100.94,48.75) ; D12.2@99.49,55.75 v1(100.94,55.75) v1(100.94,53.25) ; D9.2@99.49,60.25 v1(100.94,60.25) v1(100.94,57.75)
  Top Layer w0.5: 13.4,43.3 v1(30,43.3) ; SRAM1.33@18.323,57.214 v1(20.023,57.214) 23.423,57.214 24.223,56.414 32.423,56.414 33.223,57.214 v1(34.623,57.214) SRAM0.33@36.123,57.214 40.823,57.214 41.623,56.414 v1(45.723,56.414) SRAM0.11@47.423,56.414 ; v2(83.8,39.6) 86.1,39.6 86.6,39.1 S1.1@88.45,39.1
  Top Layer w0.75: 13.4,28.1 v1(21.6,28.1) ; v1(24.6,28.3) 25.1,27.8 SD0.4@26.425,27.8 ; v1(46.05,22.85) 47.05,22.85 ; v1(46.8,20.1) 46.8,20.85 47.05,21.1 ; v1(49.05,27.1) 49.05,26.093 ; v1(50.3,20.1) 50.3,21.1 ; v1(53.05,20.85) 53.05,21.35 52.8,21.6 52.05,21.6 ; v1(53.05,22.85) 52.05,22.85 ; 47.05,21.1 49.55,21.1 ; 47.05,21.1 47.05,22.85 ; 47.05,22.85 47.05,26.093 49.05,26.093 ; 49.05,26.093 52.043,26.093 52.05,26.1 52.05,22.85 ; 49.55,21.1 50.3,21.1 ; 49.55,21.1 50.05,21.6 52.05,21.6 ; 50.3,21.1 52.05,21.1 52.05,21.6 ; 52.05,21.6 52.05,22.85
  Top Layer w1: v1(2.4,17.7) 13.4,17.7 ; C61.1@13.4,44.675 13.4,43.3 13.4,28.1 13.4,17.7 ; v2(20.8,17.7) 13.4,17.7 ; XT0.1@35.3,68.85 v2(35.3,71.1) XT0.4@35.3,73.1 ; v2(38.05,77.1) 40.3,79.35 40.3,85.6 41.08,86.38 J1.2@42.3,86.38 42.3,87.41 42.93,88.04 69.55,88.04 70.24,87.35 J1.24@70.24,86.38 71.77,86.38 72.55,85.6 72.55,80.6 73.55,79.6 87.3,79.6 88.05,78.85 88.05,77.22 J3.1@88.02,77.25 ; v1(55.05,18.1) 55.05,16.1 61.9,9.25 67.7,9.25 ; J4.21@67.7,2.56 J4.22@67.7,5.1 67.7,9.25 ; U3.4@73.9,10.15 U4.1@70,10.15 68.6,10.15 67.7,9.25 ; U3.4@76.4,12.65 78.6,14.85 79.5,14.85 79.5,16.85 80.5,17.85 C27.1@80.5,20.1
  Top Layer w1.5: v2(80.55,24.35) v2(80.55,25.6) 83.8,28.85 v2(83.8,38.35) v2(83.8,39.6) ; v2(83.8,49.6) v2(83.8,50.85) 83.8,70.35 88.05,74.6 J3.1@88.05,77.22
  Top Layer w2: 57.3,42.6 v1(57.8,42.6) v1(59.05,42.6) v1(63.8,42.6) v1(69.05,42.6) v1(70.8,42.6) v1(70.8,46.6) v1(70.8,50.35) 70.8,51.85 70.8,54.35 v1(70.8,56.1) v1(67.55,56.1) v1(65.3,56.1) v1(61.8,56.1) v1(59.05,56.1) v1(57.3,56.1) v1(57.3,50.1) v1(57.3,47.1) v1(57.3,43.35) 57.3,42.6
  Bottom Layer w0.2: R37.2@5.825,6.175 1.075,6.175 0.49,5.59 0.49,2.2 1.59,1.1 21.8,1.1 22.55,1.85 22.55,8.1 23.55,9.1
  Bottom Layer w0.3: C45.2@28.15,14.1 28.2,14.15 v1(28.2,15.9) ; C38.2@31.7,26.7 R41.1@33.7,26.7 ; v1(33.4,15.9) v1(36.2,15.9) ; R41.1@33.8,26.5 R41.3@33.8,27.3 R41.5@33.8,28.1 R41.7@33.8,28.9 ; v1(97.49,30) v1(97.49,32.5) v1(97.49,35) v1(97.49,37.5) v1(97.49,40.1) ; v1(100.94,42.25) v1(100.94,44.25) ; v1(100.94,46.75) v1(100.94,48.75) ; v1(100.94,51.25) v1(100.94,53.25) ; v1(100.94,55.75) v1(100.94,57.75)
  Bottom Layer w0.5: v1(2.4,17.7) 2.4,19.1 ; D20.2@2.4,23.125 2.4,19.1 ; R331.2@3.6,43.6 4.5,43.6 5.26,44.36 9.34,44.36 10.1,43.6 R25.2@11,43.6 12.325,43.6 C61.1@13.4,44.675 ; U8.8@5.695,17.7 5.695,18.805 5.4,19.1 2.4,19.1 ; v1(13.4,26.5) 15.8,26.5 16.165,26.135 U6.3@16.165,24.9 ; v1(13.4,36.1) 15.6,36.1 15.9,35.8 C58.2@15.9,34.7 15.9,33.6 16.165,33.335 U6.6@16.165,32.1 U6.5@14.895,32.1 ; C33.2@18.323,57.714 19.523,57.714 v1(20.023,57.214) ; v1(21.6,28.1) 21.6,29.1 22,29.5 27.6,29.5 30.4,26.7 C38.2@31.7,26.7 v1(31.7,25.45) ; R24.1@26.123,53.814 C32.2@26.123,55.914 27.023,55.914 27.523,56.414 v1(27.823,56.414) ; J5.2@27.84,11.6 J5.2@28.05,11.81 ; v1(30,43.3) 30.9,42.4 R34.1@30.9,39.9 R38.1@30.9,37.9 ; v1(34.623,57.214) 35.123,57.714 C31.2@36.523,57.714 ; C48.1@44.95,22.85 v1(46.05,22.85) ; v1(45.723,56.414) 45.983,56.414 46.483,55.914 C30.2@47.423,55.914 R23.1@47.423,53.814 ; C49.1@46.8,19 v1(46.8,20.1) ; R48.1@47.6,28.2 47.6,27.5 48,27.1 v1(49.05,27.1) ; C52.1@50.3,19 v1(50.3,20.1) ; v1(53.05,20.85) C47.1@54.15,20.85 ; C3.2@54.45,41.85 55.3,41.85 55.55,42.1 v1(55.55,42.6) 56.3,43.35 v1(57.3,43.35) ; C12.2@54.45,46.35 55.3,46.35 55.55,46.6 v1(55.55,47.1) v1(57.3,47.1) ; C2.2@54.45,50.85 55.3,50.85 55.55,50.6 v1(55.55,50.1) v1(57.3,50.1) ; C1.2@54.45,56.85 v1(55.55,56.85) 56.55,56.85 v1(57.3,56.1) ; C13.2@56.3,39.75 56.3,40.6 56.05,40.85 v1(55.55,40.85) 56.55,41.85 57.05,41.85 v1(57.8,42.6) ; C4.2@58.8,39.75 58.8,40.6 v1(58.55,40.85) 58.55,42.1 v1(59.05,42.6) ; v1(59.05,56.1) v1(59.05,57.85) C11.2@59.05,58.95 ; C16.2@61.3,58.95 61.3,58.1 61.55,57.85 v1(61.8,57.85) v1(61.8,56.1) ; C14.2@63.8,39.75 v1(63.8,40.85) v1(63.8,42.6) ; v1(65.3,56.1) v1(65.3,57.85) 65.55,57.85 65.8,58.1 C10.2@65.8,58.95 ; v1(67.55,56.1) v1(67.55,57.85) 67.8,57.85 68.05,58.1 C9.2@68.05,58.95 ; v1(69.05,42.6) v1(69.05,40.85) 69.3,40.85 69.55,40.6 C5.2@69.55,39.75 R39.1@72.05,39.75 ; v1(70.8,42.6) 72.3,42.6 v1(72.55,42.35) C6.2@73.65,42.35 ; v1(70.8,46.6) v1(72.55,46.6) 72.8,46.35 C7.2@73.65,46.35 ; v1(70.8,50.35) v1(72.55,50.35) 72.55,50.6 72.8,50.85 C15.2@73.65,50.85 ; v1(70.8,56.1) 72.3,56.1 v1(72.55,56.35) 72.55,57.1 72.8,57.35 C8.2@73.65,57.35
  Bottom Layer w0.508: v1(53.05,22.85) 53.3,23.1 C46.1@54.15,23.1
  Bottom Layer w0.75: v1(21.6,28.1) 24.4,28.1 v1(24.6,28.3) ; C37.2@40.3,85.88 41.8,85.88 J1.2@42.3,86.38 ; C56.2@67.584,7.676 C56.2@67.7,7.56
  Bottom Layer w1: C61.1@13.4,44.675 13.4,55.875 15.239,57.714 C33.2@18.323,57.714 ; v2(20.8,17.7) 20.8,10.7 21.8,9.7 R32.2@23.3,9.7 ; 23.55,9.1 27.43,9.1 ; J5.2@27.84,11.6 27.84,9.51 ; J5.2@28.05,11.81 28.15,11.91 C45.2@28.15,14.1 ; v2(35.3,71.1) 36.2,72 C35.2@38.05,72 v2(38.05,77.1) ; v1(51.8,21.1) 51.8,20.1 53.8,18.1 v1(55.05,18.1) ; C56.2@67.7,7.56 J4.22@67.7,5.1 J4.21@67.7,2.56 67.7,1.43 67.15,0.88 40.52,0.88 39.8,1.6 39.8,8.35 39.05,9.1 28.25,9.1 ; C27.1@80.5,20.1 80.9,19.7 C29.2@80.9,17.85 ; J3.1@88.02,77.25 88.02,75.28 C36.2@88.05,75.25 ; 27.43,9.1 28.25,9.1 ; 27.43,9.1 27.84,9.51 ; 27.84,9.51 28.25,9.1
  Bottom Layer w1.5: v3(70.8,44.35) 83.8,44.35 ; C27.1@80.5,20.1 80.55,20.15 v2(80.55,24.35) v2(80.55,25.6) ; v2(83.8,38.35) v2(83.8,39.6) 83.8,44.35 ; v2(83.8,50.85) v2(83.8,49.6) 83.8,44.35